# Altium PCB CSpcb.PcbDoc
Units mm, origin at the board's own origin, x right, y up, seen from the top; angles counter-clockwise.
Board outline 34.67 x 20.47 mm, 2 copper layers (Top Layer, Bottom Layer), stack 0.971 mm thick; 15 components, 11 nets, 42 pads, 6 vias.
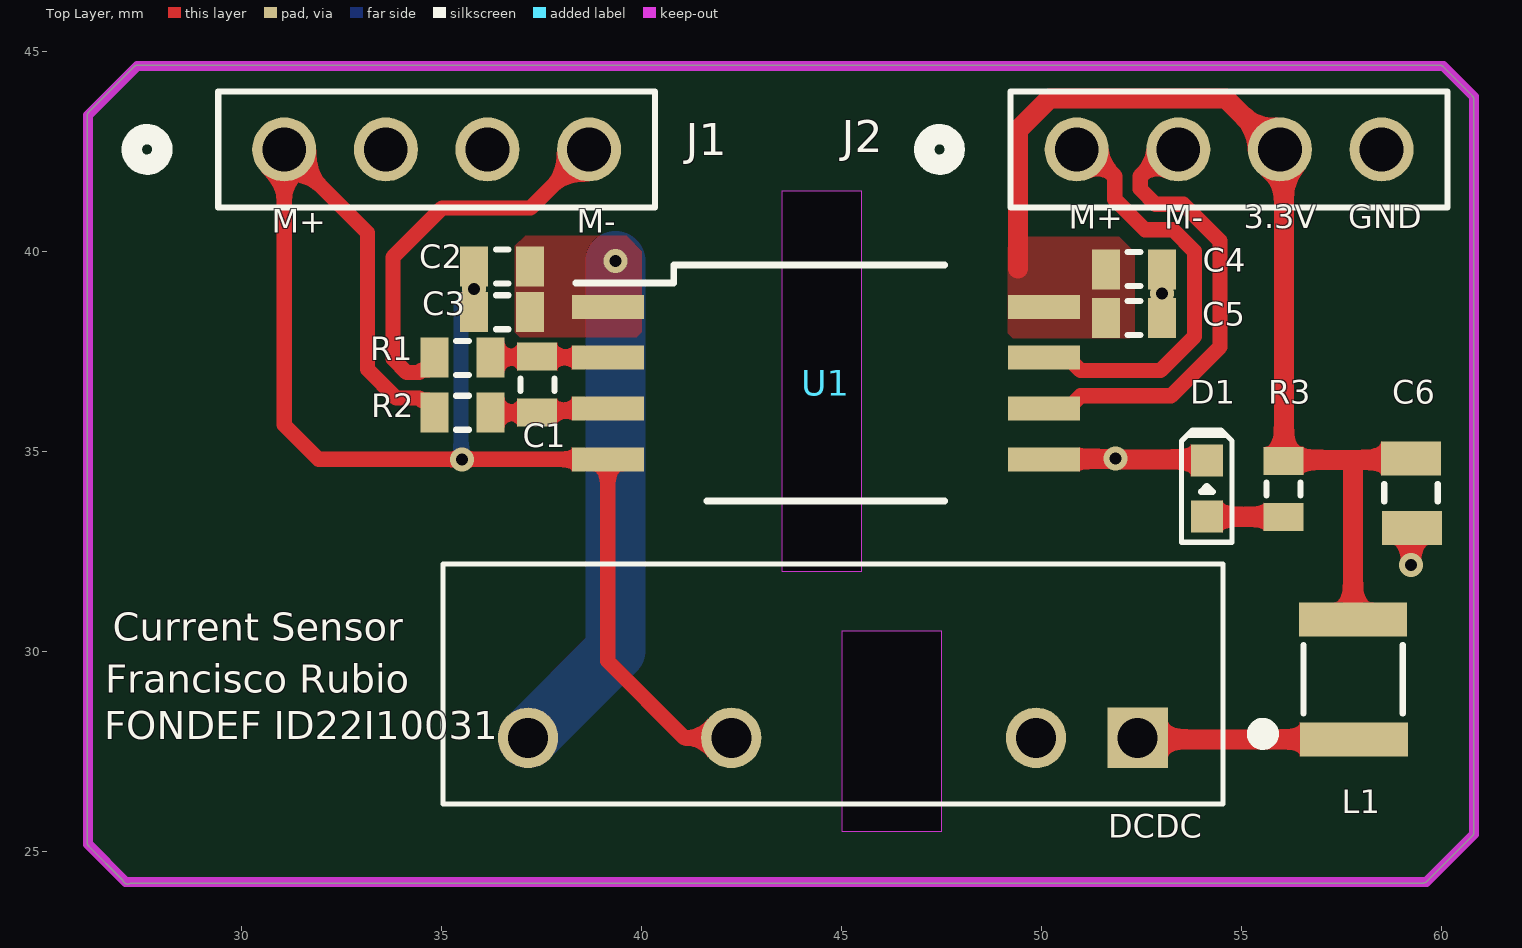
[diagram p0: Top Layer view]
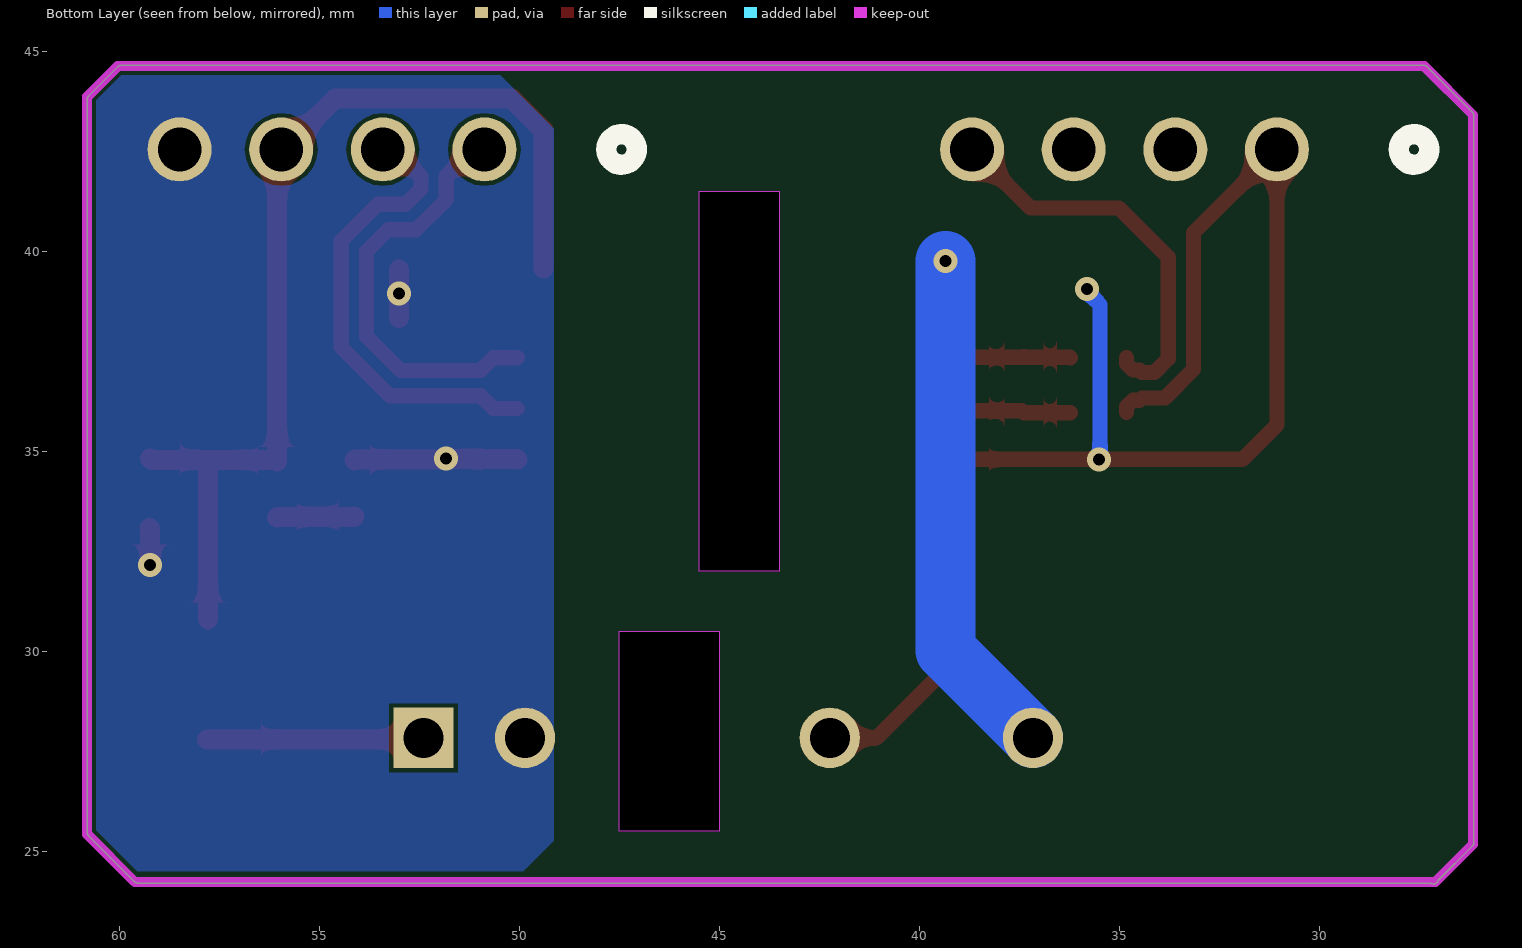
[diagram p1: Bottom Layer view, seen from below]
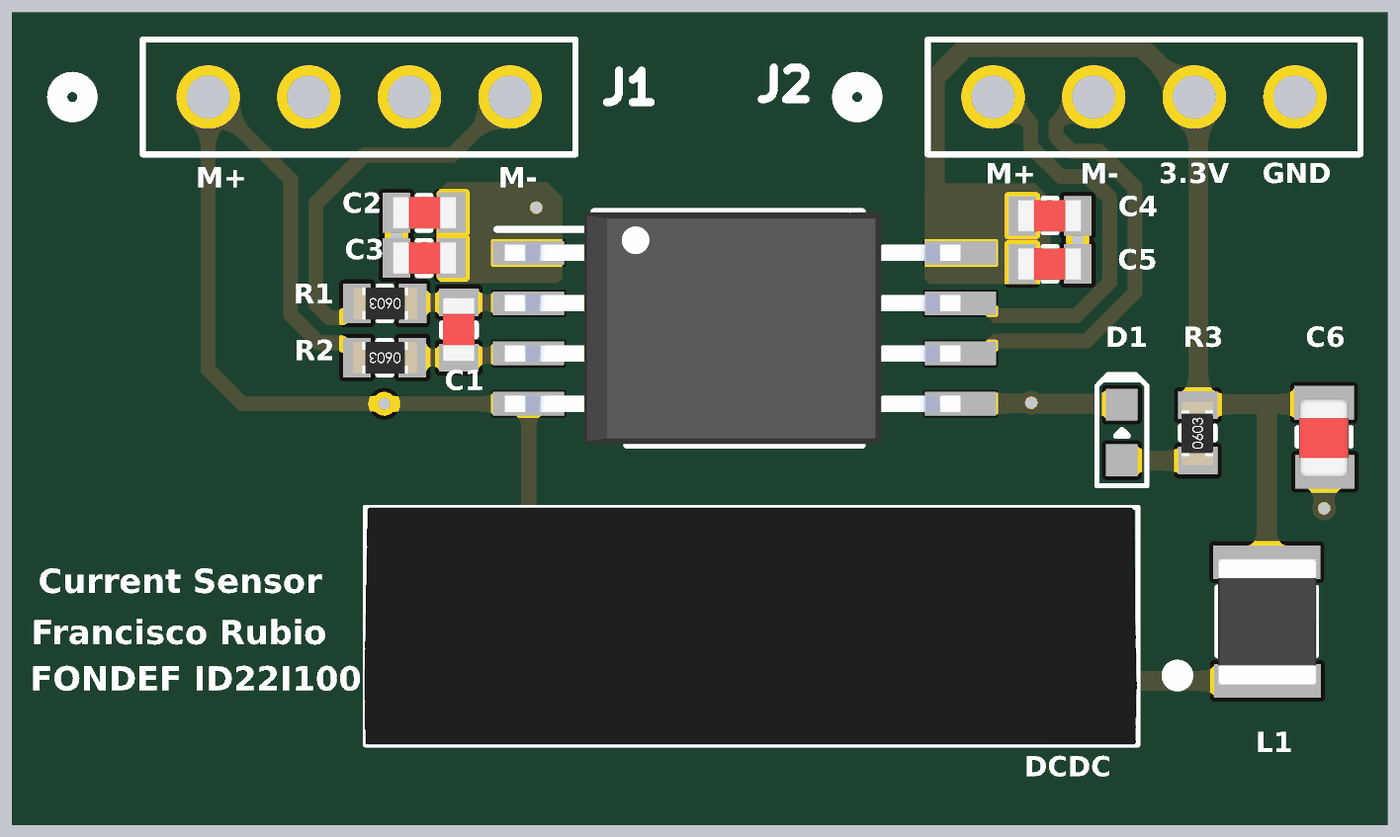
[diagram p2: 3D render of the assembled board from above, using the file's embedded part models]

## Layer stack, top to bottom
Top Solder: solder mask 0.0102, Solder Resist, Dk 3.5
Top Layer: signal copper 0.0356
Dielectric 1: dielectric 0.9, FR-4, Dk 4.8
Bottom Layer: signal copper 0.0356
Bottom Solder: solder mask 0.0102, Solder Resist, Dk 3.5

## Board outline
26.174,25.132 27.029,24.277 ccw(c27.153,24.308) 27.229,24.206 59.538,24.206 ccw(c59.538,24.333) 59.628,24.244 59.628,24.243 60.771,25.386 60.77,25.386 ccw(c60.681,25.476) 60.808,25.476 60.808,43.79 ccw(c60.681,43.79) 60.77,43.88 60.771,43.88 60.034,44.616 60.035,44.616 ccw(c59.944,44.526) 59.944,44.654 27.407,44.654 ccw(c27.407,44.526) 27.316,44.616 27.317,44.616 26.174,43.473 26.174,43.474 ccw(c26.264,43.383) 26.136,43.383 26.136,25.222 ccw(c26.264,25.222)
cut-out: 45,30.5 45,25.5 47.5,25.5 47.5,30.5
cut-out: 43.5,41.5 43.5,32 45.5,32 45.5,41.5

## Design rules (kind name [scope] priority, off if disabled: settings)
Clearance [All] p1: gap=0.1 ignorepadtopadclearanceinfootprint=FALSE
DiffPairsRouting [All] p1: maxlimit=0.254 minlimit=0.254 mostfreqgap=0.254 toplayer_minwidth=0.381 toplayer_maxwidth=0.381 toplayer_prefwidth=0.381 bottomlayer_minwidth=0.381 bottomlayer_maxwidth=0.381 bottomlayer_prefwidth=0.381 maxuncoupledlength=12.7
PolygonConnect [All] p1: connectstyle=Direct reliefconductorwidth=0.254 reliefentries=4 polygonreliefangle="90 Angle" airgapwidth=0.254
RoutingVias [All] p1: holewidth=0.3 width=0.6 viastyle="Through Hole" minholewidth=0.3 minwidth=0.6 maxholewidth=0.3 maxwidth=0.6
SolderMaskExpansion [All] p1: expansion=0.102 istentingtop=FALSE
Width [All] p1: maxlimit=1.5 minlimit=0.254 preferedwidth=0.5 minimp=50.000000 maximp=50.000000 favimp=50.000000
29 further rules are at their usual default settings.

## Classes and differential pairs
differential pair i1: +I_pot_+ -I_pot_-
differential pair I2: +NetC1_1 -NetC1_2

## Components (designator, comment, footprint, x,y, rotation, side; value= is the part's Value field where it differs from the comment)
C1 "0.01uF" CAP_0603 37.389,37.363 r0 top value=100nF
C2 "100nF" CAP_0603 37.214,39.624 r270 top
C3 "100nF" CAP_0603 37.214,38.481 r270 top
C4 "100nF" CAP_0603 51.613,39.548 r90 top
C5 "100nF" CAP_0603 51.613,38.329 r90 top
C6 "4.7uF" CAP_0805 59.233,34.823 r0 top value=100nF
D1 "Yellow" LED_0603_Yellow 54.127,33.373 r180 top
DCDC "PEM1-S3-S5-S" CONV_PEM1-S3-S5-S 44.78,29.185 r180 top
J1 "M20-9990446" CONN_M20_4_HRW 31.064,42.545 r0 top
J2 "M20-9990446" CONN_M20_4_HRW 50.876,42.545 r0 top
L1 "6.8uH" INDUCTOR_1210 57.785,30.8 r0 top value=10uH
R1 "20k" RES_0603 36.223,37.338 r270 top value=10k
R2 "20k" RES_0603 36.22,35.966 r270 top value=10k
R3 "20k" RES_0603 56.047,33.361 r180 top value=10k
U1 "AMC1311DWVR" DWV0008A 44.602,36.703 r0 top

## Footprints (in the part's own frame and the unit in brackets; to place one, negate y for a bottom-side part, rotate by r counter-clockwise, add the part's x,y. Pads: shape width x height; smd on the part's side, far side on the other; paste and mask are expansions set on the pad)
CAP_0603 [mm] "CAP CER 0603"
  rect 1x0.7 smd: 1(0,0) 2(0,-1.4)
  silkscreen extent -0.42,-0.86 0.43,-0.54, body extent -0.4,-1.49 0.4,0.11, height 0.3
CAP_0805 [mm] "CAP CER 0805"
  rect 1.5x0.85 smd: 1(0,0) 2(0.02,-1.74)
  silkscreen extent -0.67,-1.08 0.67,-0.64, body extent -0.63,-1.89 0.62,0.11, height 0.78
CONN_M20_4_HRW [mil] "Connector Header Through Hole 4 position 0.079\" (2.00mm)"
  round 63 / inner round 60 / far side round 63 hole 43 paste-31.5 mask+0: 1(0,0) 2(100,0) 3(200,0) 4(300,0)
  silkscreen extent -150,-57 365,57
CONV_PEM1-S3-S5-S [mm]
  rect 1.508x1.508 hole 1: 1(-7.62,1.35)
  round 1.508 hole 1: 2(-5.08,1.35) 5(2.54,1.35) 7(7.62,1.35)
  silkscreen extent -10.95,-3 9.75,3, body extent -9.72,-3 9.78,3, height 9
DWV0008A [mm]
  rect 1.8x0.6 smd paste+0 mask+0.051: 1(-5.45,1.905) 2(-5.45,0.635) 3(-5.45,-0.635) 4(-5.45,-1.905) 5(5.45,-1.905) 6(5.45,-0.635) 7(5.45,0.635) 8(5.45,1.905)
  silkscreen extent -6.25,-2.95 2.98,2.95, body extent -6.05,-2.92 5.45,2.93, height 2.8
INDUCTOR_1210 [mm] "INDUCTOR 1210"
  rect 2.7x0.85 smd: 1(0,0) 2(0.02,-3)
  silkscreen extent -1.24,-2.36 1.24,-0.64, body extent -1.24,-3.11 1.26,0.09, height 1.5
LED_0603_Yellow [mm] "LED 0603"
  rect 0.8x0.8 smd: 1(0,0) 2(0,-1.4)
  silkscreen extent -0.63,-2.16 0.63,0.65, body extent -0.4,-1.46 0.4,0.14, height 0.4
RES_0603 [mm] "RES 0603"
  rect 1x0.7 smd: 1(0,0) 2(0,-1.4)
  silkscreen extent -0.42,-0.86 0.43,-0.54, body extent -0.39,-1.49 0.41,0.11, height 0.45

## Part data
C1 C2 C3 C4 C5: library part Cap_0603, "0.1µF ±10% 50V Ceramic Capacitor X7R 0603 (1608 Metric)", Package=0603, Supplier Part Number 1=399-5089-1-ND, Created=2020_06_15_DAarancibia, MF=KEMET, MFP=C0603C104K5RACTU, Supplier 1=Digi-Key
C6: library part Cap_0805, "0.1µF ±10% 50V Ceramic Capacitor X7R 0805 (2012 Metric)", Package=0805, Supplier Part Number 1=399-1170-1-ND, Created=2020_06_15_DAarancibia, MF=KEMET, MFP=C0805C104K5RACTU, Supplier 1=Digi-Key
D1: library part Led_0603_Yellow, "Yellow 590nm LED Indication - Discrete 2V 0603 (1608 Metric)", Package=0603, Supplier Part Number 1=732-4981-1-ND, Created=2020_07_06_DAarancibia, MF="Würth Elektronik", MFP=150060YS75000, Supplier 1=Digi-Key
DCDC: "12 Vdc, 0.083 A, 1 W, 10.8~13.2 Vdc Input Range", Package=None, Availability=Unavailable, MP=PEM1-S3-S5-S, Price=None
J1 J2: "No Description Available", Mfr_Name=Harwin, RefDes=RefDes, Type=Type
L1: library part Inductor_1210, "10µH Unshielded Wirewound Inductor 700mA 350mOhm Max 1210 (3225 Metric)", Package=1210, Supplier Part Number 1=587-5505-1-ND, Created=2020_07_06_DAarancibia, MF="Taiyo Yuden", MFP=BRL3225T100M, Supplier 1=Digi-Key
R1 R2 R3: library part Res_0603, "10 kOhms ±1% 0.1W, 1/10W Chip Resistor 0402 (1005 Metric) Anti-Sulfur, Automotive AEC-Q200 Thick Film", Package=0603, Supplier Part Number 1=P10.0KHCT-ND, Created=2020_06_15_DAarancibia, MF="Panasonic Electronic Components", MFP=ERJ-3EKF1002V, Supplier 1=Digi-Key
U1: "No Description Available", Mfr_Name="Texas Instruments", RefDes=RefDes, Type=TYPE

## Via types
v1: diameter 0.6, hole 0.3, Top Layer to Bottom Layer, 3 vias
v2: diameter 0.6, hole 0.3, Top Layer to Bottom Layer, tented both sides, 3 vias

## Nets (pads, with @x,y where several pads share a name; then routed paths per layer and width w, separated by ;. In a path a pad name is that pad's centre, name@x,y a point inside that pad or via, vN(x,y) a via of type N, cw(c..) or ccw(c..) an arc to the next point about the centre after c; other vN are vias at no path point)
3.3V: C4.1 C5.1 C6.1 J2.3 L1.1 R3.2 U1.8 | length 25.9
  Top Layer w0.5: 49.403,39.573 49.403,43.028 50.19,43.815 54.61,43.815 55.88,42.545 J2.3 56.058,42.443 56.058,34.75 56.094,34.787 57.645,34.787 ; L1.1 57.785,34.647 57.645,34.787 ; C6.1 59.196,34.787 57.645,34.787
5V_DC-: C2.1 C3.1 DCDC.7 U1.1 | length 12.9
  Top Layer w0.5: DCDC.7 DCDC.7@37.186,27.86
  Bottom Layer w1.5: DCDC.7 39.345,30.019 v2(39.345,39.751)
GND: C4.2 C5.2 C6.2 D1.2 DCDC.2 J2.4 U1.5 | length 6.3
  Top Layer w0.5: U1.5 50.065,34.811 v2@51.854,34.811 ; v2(51.841,34.823) v2@51.854,34.811 ; C5.2 v1(53.013,38.938) C4.2 ; D1.2 54.102,34.798 51.867,34.798 v2@51.854,34.811 ; v2(59.233,32.156) 59.233,33.063 C6.2
I_pot_+: J1.4 R1.2 | length 10
  Top Layer w0.381: R1.2 34.823,37.188 34.664,37.028 34.5,37.028 34.441,36.97 34.125,36.97 33.782,37.313 33.782,39.853 35.012,41.082 37.221,41.082 J1.4
I_pot_-: C2.2 C3.2 DCDC.5 J1.1 R2.2 U1.4 | length 37.2
  Top Layer w0.381: R2.2 34.82,36.116 34.661,36.276 34.497,36.276 34.438,36.335 33.862,36.335 33.147,37.05 33.147,40.462 J1.1 31.064,35.662 31.928,34.798 v1(35.509,34.798) U1.4 39.152,29.758 41.076,27.835 DCDC.5
  Bottom Layer w0.381: v1(35.509,34.798) 35.484,34.823 35.484,38.663 35.814,38.993 v1(35.814,39.052)
I_sense_+: J2.1 U1.7 | length 10.7
  Top Layer w0.381: U1.7 50.652,37.338 50.97,37.02 52.972,37.02 53.823,37.871 53.823,39.999 53.283,40.538 52.585,40.538 51.829,41.295 51.829,41.873 51.157,42.545 J2.1
I_sense_-: J2.2 U1.6 | length 11.8
  Top Layer w0.381: U1.6 50.652,36.068 50.97,36.386 53.235,36.386 54.458,37.608 54.458,40.262 53.546,41.173 52.848,41.173 52.464,41.558 52.464,41.873 53.135,42.545 J2.2
NetC1_1: C1.1 R1.1 U1.2 | length 3
  Top Layer w0.381: R1.1 36.236,37.351 37.376,37.351 C1.1 37.402,37.351 39.14,37.351 U1.2
NetC1_2: C1.2 R2.1 U1.3 | length 3
  Top Layer w0.381: R2.1 36.222,35.965 37.387,35.965 C1.2 37.441,36.016 39.1,36.016 U1.3
NetD1_1: D1.1 R3.1 | length 1.9
  Top Layer w0.5: D1.1 54.139,33.361 R3.1 R3.1@56.058,33.35
NetDCDC_1: DCDC.1 L1.2 | length 5.4
  Top Layer w0.5: DCDC.1 52.435,27.8 L1.2
pads on no net: J1.2 J1.3

## Polygon pours and split planes (outlines as drawn)
5V_DC- on Top Layer "5V_DC-_L01_P023" (solid, pour order 23): 36.957,37.846 36.83,37.973 36.83,40.132 37.084,40.386 39.624,40.386 40.005,40.005 40.005,37.973 39.878,37.846
3.3V on Top Layer "3.3V_L01_P031" (solid, pour order 31): 49.276,37.821 49.149,37.948 49.149,40.107 49.403,40.361 51.943,40.361 52.324,39.98 52.324,37.948 52.197,37.821
no net on Top Layer "NONET_L01_P010" (solid, pour order 10): 49.098,38.938
no net on Top Layer "NONET_L01_P000" (solid, pour order 0): 51.896,33.286
GND on Bottom Layer "GND_L02_P015" (solid, pour order 15): 49.148,43.068 49.148,25.262 49.91,24.5 60.07,24.5 60.705,25.135 60.705,43.881 60.019,44.566 50.646,44.566
no net on Bottom Layer "NONET_L02_P007" (solid, pour order 7): 40.056,34.188

## Keep-outs
Keep-Out Layer:
  lines w0.254: 27.102,24.232 26.162,25.171 26.162,43.409 27.381,44.628 60.046,44.628 60.808,43.866 60.808,25.425 59.614,24.232 27.127,24.232

## Silkscreen, mask and mechanical layers (free items; w line width, h text height)
Top Overlay:
  text "3.3V" at 55.056,40.374 h1
  text "GND" at 57.668,40.374 h1
  text "M+" at 50.672,40.367 h1
  text "M-" at 53.067,40.367 h1
  text "M+" at 30.755,40.262 h1
  text "M-" at 38.382,40.262 h1
  text "Current Sensor" at 26.772,30.023 h1.2
  text "Francisco Rubio" at 26.594,28.727 h1.2
  text "FONDEF ID22I10031" at 26.568,27.559 h1.2

## Dimensions
59.628,24.243 to 60.034,44.616 on Mechanical 1
26.174,25.132 to 60.808,25.476 on Mechanical 1